# Altium PCB HANDS_FREE_ControlUnit_V2.PcbDoc (part 1 of 3)
Units mil, origin at the board's own origin, x right, y up, seen from the top; angles counter-clockwise.
Board outline 2130 x 3330 mil, 2 copper layers (Top Layer, Bottom Layer); 111 components, 108 nets, 500 pads, 191 vias.
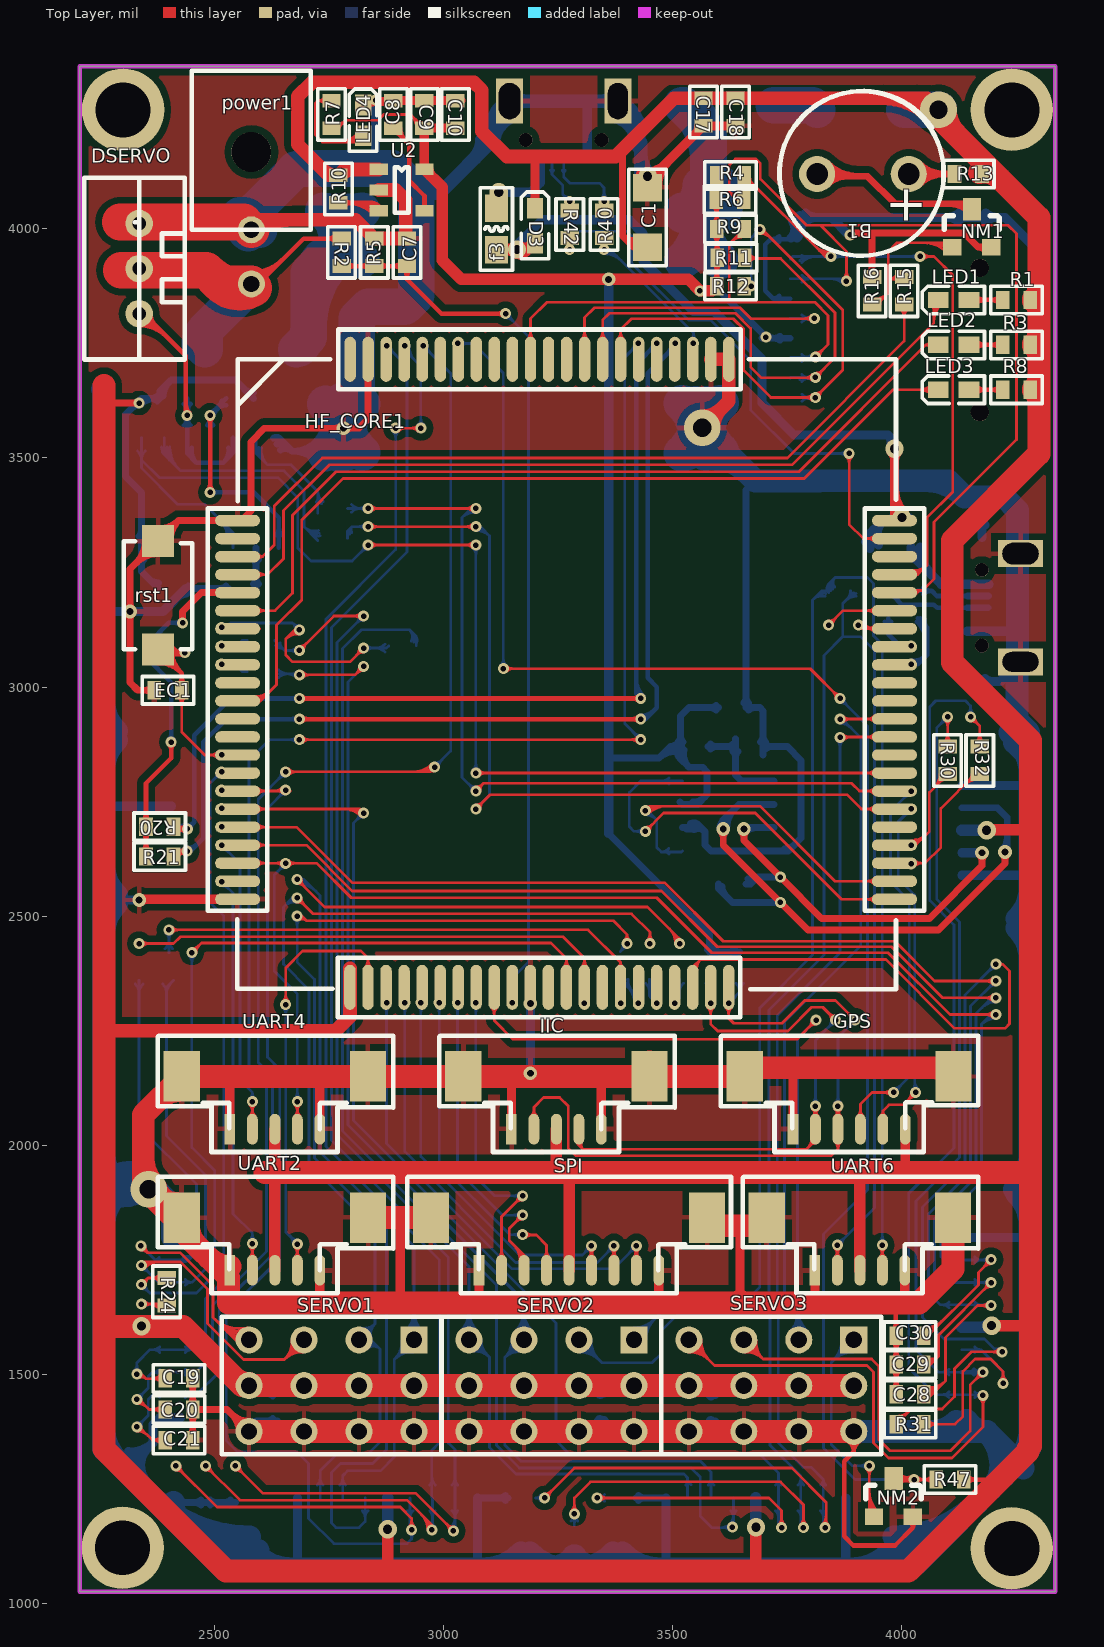
[diagram p0: Top Layer view]
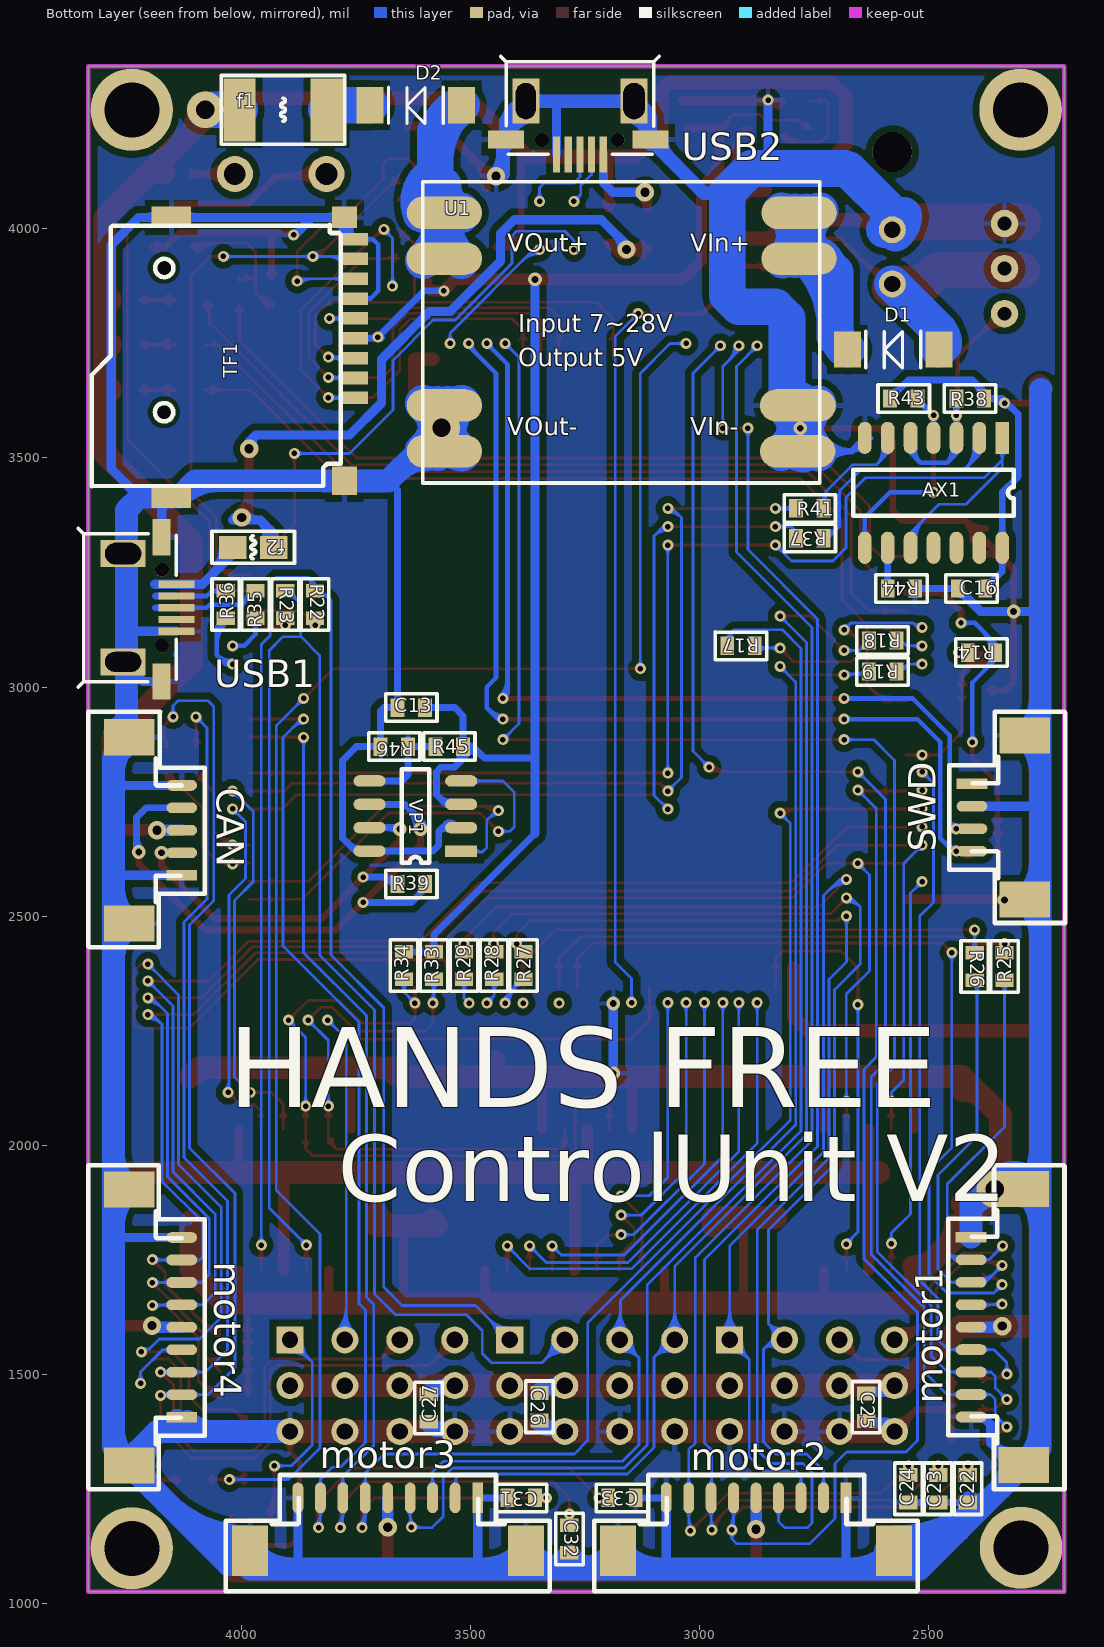
[diagram p1: Bottom Layer view, seen from below]

## Layer stack, top to bottom
Top Layer: signal copper 1.4
Dielectric: dielectric 12.6, FR-4, Dk 4.8
Bottom Layer: signal copper 1.4

## Board outline
2205,1025 4335,1025 4335,4355 2205,4355

## Design rules (kind name [scope] priority, off if disabled: settings)
Clearance [All] p1: gap=6
ComponentClearance [All] p1 off: gap=10 collisioncheckmode=3 verticalgap=10 showdistances=FALSE
Height [All] p1 off: minheight=0 maxheight=1000 prefheight=500
PolygonConnect [All] p1: connectstyle=Relief reliefconductorwidth=10 reliefentries=4 polygonreliefangle="90 Angle"
RoutingVias [All] p1: holewidth=15 width=30 viastyle="Through Hole" minholewidth=12 minwidth=24 maxholewidth=40 maxwidth=80
SilkscreenOverComponentPads [All] p1: minsilkscreentomaskgap=10
SolderMaskExpansion [All] p1: expansion=4
Width [All] p1: maxlimit=200 minlimit=6 preferedwidth=6
25 further rules are at their usual default settings.

## Components (designator, comment, footprint, x,y, rotation, side; value= is the part's Value field where it differs from the comment)
AX1 "CHP_74HC126D" CHP_SOP_14P 2340,3544 r270 bottom
B1 "ELE_蜂鸣器 9*5.5 mm 3V" ELE_蜂鸣器_D_9*5.5 3915,4120 r180 top
C1 "47uf" ELE_1206_P 3445,4090 r270 top
C7 "10uf" ELE_0603_P 2919.63,3949 r90 top
C8 "10nf" ELE_0603_P 2890.02,4250 r270 top
C9 "22uF" ELE_0603_P 2957.51,4250 r90 top
C10 "0.1uF" ELE_0603_P 3025,4250 r90 top
C13 "10uf" ELE_0603_P 3630,2955 r180 bottom
C16 "10uf" ELE_0603_P 2407,3215 r0 bottom
C17 "10uf" ELE_0603_P 3567,4255 r270 top
C18 "1uf" ELE_0603_P 3637,4255 r270 top
C19 "100pf" ELE_0603_P 2422,1491 r180 top
C20 "100pf" ELE_0603_P 2422,1423 r180 top
C21 "100pf" ELE_0603_P 2422,1356 r180 top
C22 "100pf" ELE_0603_P 2415,1250 r90 bottom
C23 "100pf" ELE_0603_P 2480,1250 r90 bottom
C24 "100pf" ELE_0603_P 2545,1250 r90 bottom
C25 "10uf" ELE_0603_P 2637,1428 r270 bottom
C26 "10uf" ELE_0603_P 3350,1429 r270 bottom
C27 "10uf" ELE_0603_P 3592,1426 r270 bottom
C28 "100pf" ELE_0603_P 4018,1456 r0 top
C29 "100pf" ELE_0603_P 4018,1521 r0 top
C30 "100pf" ELE_0603_P 4018,1584 r0 top
C31 "100pf" ELE_0603_P 3390,1230 r180 bottom
C32 "100pf" ELE_0603_P 3285,1140 r90 bottom
C33 "100pf" ELE_0603_P 3170,1230 r0 bottom
CAN "HANDS_FREE_IMU" HDR_Molex_PH_1.25_5P 4131,2589 r90 bottom
D1 "SS34" ELE_D1206 2478,3837 r0 bottom
D2 "SS34" ELE_D1206 3520,4370 r0 bottom
D3 "1N5819" ELE_SOD-323 3200,3970 r90 top
DSERVO "HDR_Header_1*3" HDR_数字舵机接口_D 2335,3815 r180 top
EC1 "10uf" ELE_0603_P 2398,2993 r180 top
f1 "1812/3A" ELE_FUZE_1812 3840,4255 r0 bottom
f2 "0805/500mA" ELE_FUZE_0805 4020,3305 r180 bottom
f3 "0805/500mA" ELE_FUZE_0805 3115,4045 r270 top
GPS "HANDS_FREE_GPS" HDR_Molex_PH_1.25_6P 3762,2035 r0 top
HF_CORE1 "MDE_HF_CORE1" MDE_HF_CORE1 3267,3030 r0 top
IIC "HANDS_FREE_IIC" HDR_Molex_PH_1.25_5P 3147.5,2035 r0 top
LED1 "ELE_LED" ELE_0603极性_P 4135,3841 r180 top
LED2 "ELE_LED" ELE_0603极性_P 4135,3743 r180 top
LED3 "ELE_LED" ELE_0603极性_P 4135,3645 r180 top
LED4 "Led_sp" ELE_0603极性_P 2820,4215 r90 top
motor1 "Motor Io header" HDR_Molex_PH_1.25_9P 2408,1799 r270 bottom
motor2 "Motor Io header" HDR_Molex_PH_1.25_9P 2681,1230 r0 bottom
motor3 "Motor Io header" HDR_Molex_PH_1.25_9P 3485,1230 r0 bottom
motor4 "Motor Io header" HDR_Molex_PH_1.25_9P 4131,1406 r90 bottom
NM1 "AO3400" CHP_SOT23_P_3P 4110,3960 r0 top
NM2 "AO3400" CHP_SOT23_P_3P 3939,1189 r0 top
power1 "HDR_Header_Power_2P" HDR_MOLEX_CANMX3.0_DH_2P 2580,3880 r90 top
R1 "10K" ELE_0603_P 4250,3845 r180 top
R2 "10K" ELE_0603_P 2777,3949 r270 top
R3 "10K" ELE_0603_P 4250,3747 r180 top
R4 "10K" ELE_0603_P 3626,4117 r180 top
R5 "1K" ELE_0603_P 2848.29,3949 r90 top
R6 "10K" ELE_0603_P 3625,4064 r180 top
R7 "1k" ELE_0603_P 2755,4250 r90 top
R8 "10K" ELE_0603_P 4250,3649 r180 top
R9 "10K" ELE_0603_P 3626,4000 r180 top
R10 "1k" ELE_0603_P 2770,4087 r270 top
R11 "10K" ELE_0603_P 3627,3937 r180 top
R12 "10K" ELE_0603_P 3626,3875 r180 top
R13 "120R" ELE_0603_P 4145,4120 r180 top
R14 "10k" ELE_0603_P 2385,3075 r0 bottom
R15 "50R" ELE_0603_P 4005,3865 r270 top
R16 "10K" ELE_0603_P 3935,3865 r270 top
R17 "50R" ELE_0603_P 2910,3090 r0 bottom
R18 "50R" ELE_0603_P 2601,3101.5 r0 bottom
R19 "50R" ELE_0603_P 2601,3034 r0 bottom
R20 "10K" ELE_0603_P 2380,2695 r0 top
R21 "10K" ELE_0603_P 2380,2630 r0 top
R22 "50R" ELE_0603_P 3840,3180 r270 bottom
R23 "50R" ELE_0603_P 3904.99,3180 r270 bottom
R24 "50R" ELE_0603_P 2395,1680 r270 top
R25 "50R" ELE_0603_P 2335,2390 r270 bottom
R26 "50R" ELE_0603_P 2400,2390 r270 bottom
R27 "50R" ELE_0603_P 3385,2392 r90 bottom
R28 "50R" ELE_0603_P 3449.12,2392 r90 bottom
R29 "50R" ELE_0603_P 3514.75,2392 r90 bottom
R30 "50R" ELE_0603_P 4100,2840 r270 top
R31 "50R" ELE_0603_P 4018,1391 r0 top
R32 "50R" ELE_0603_P 4170,2840 r270 top
R33 "10K" ELE_0603_P 3580.37,2392 r90 bottom
R34 "10K" ELE_0603_P 3646,2392 r90 bottom
R35 "50R" ELE_0603_P 3969.97,3180 r90 bottom
R36 "50R" ELE_0603_P 4035,3180 r90 bottom
R37 "50R" ELE_0603_P 2760,3325 r0 bottom
R38 "10K" ELE_0603_P 2410,3630 r0 bottom
R39 "120R" ELE_0603_P 3630,2570 r180 bottom
R40 "50R" ELE_0603_P 3350,4010 r90 top
R41 "50R" ELE_0603_P 2760,3390 r180 bottom
R42 "50R" ELE_0603_P 3275,4010 r90 top
R43 "10K" ELE_0603_P 2555,3630 r0 bottom
R44 "10k" ELE_0603_P 2560,3215 r180 bottom
R45 "1K" ELE_0603_P 3547,2870 r180 bottom
R46 "1K" ELE_0603_P 3667,2870 r0 bottom
R47 "10K" ELE_0603_P 4105,1270 r180 top
rst1 "ELE_KEY_1" ELE_KEY_P 2376,3161 r90 top
SERVO1 "HDR_Header_4*3" HDR_Header_2.54/3.0_DV_3*4 2935,1575 r180 top
SERVO2 "HDR_Header_4*3" HDR_Header_2.54/3.0_DV_3*4 3415,1575 r180 top
SERVO3 "HDR_Header_4*3" HDR_Header_2.54/3.0_DV_3*4 3895,1575 r180 top
SPI "HANDS_FREE_SPI" HDR_Molex_PH_1.25_9P 3077,1727 r0 top
SWD "HANDS_FREE_SWD" HDR_Molex_PH_1.25_4P 2406,2789 r270 bottom
TF1 "HDR_MicroTFCARD" HDR_TFCARD_P 3955,3720 r0 bottom
U1 "MDE_DM02-5.0" MDE_DM02-5.0 3171,3775 r180 bottom
U2 "" CHP_SOT23_P_5P 2863,4125 r0 top
UART2 "HANDS_FREE_USART" HDR_Molex_PH_1.25_5P 2533,1727 r0 top
UART4 "HANDS_FREE_USART" HDR_Molex_PH_1.25_5P 2533,2035 r0 top
UART6 "HANDS_FREE_USART" HDR_Molex_PH_1.25_5P 3810,1727 r0 top
USB1 "USBMICRO" HDR_USB_Micro2 4144,3175 r270 bottom
USB2 "USBMICRO" HDR_USB_Micro2 3260,4164 r0 bottom
VP1 "CHP_VP230_P" CHP_VP230_P 3521,2642 r0 bottom

## Footprints (in the part's own frame and the unit in brackets; to place one, negate y for a bottom-side part, rotate by r counter-clockwise, add the part's x,y. Pads: shape width x height; smd on the part's side, far side on the other; paste and mask are expansions set on the pad)
CHP_SOP_14P [mil]
  rect 70x30 smd: 1(0,0)
  oval 70x30 smd: 2(0,-50) 3(0,-100) 4(0,-150) 5(0,-200) 6(0,-250) 7(0,-300) 8(240,-300) 9(240,-250) 10(240,-200) 11(240,-150) 12(240,-100) 13(240,-50) 14(240,0)
  silkscreen extent 70,-325 170,25
CHP_SOT23_P_3P [mil]
  rect 40x36 smd: 1(0,0) 2(85,0)
  rect 40x50 smd: 3(43,83)
  silkscreen extent -18,39 103,69
CHP_SOT23_P_5P [mil]
  rect 40x25 smd: 1(-5,5) 2(-5,-40) 3(-5,-85) 4(95,-85) 5(95,5)
  silkscreen extent 30,-90 60,10
CHP_VP230_P [mil]
  rect 70x25 smd: 1(0,0)
  oval 70x25 smd: 2(0,-51) 3(0,-102) 4(0,-153) 5(200,-153) 6(200,-102) 7(200,-51) 8(200,0)
  silkscreen extent 70,-178 130,26
ELE_0603_P [mil]
  rect 30x40 smd: 1(-30,0) 2(30,0)
  silkscreen extent -56,-30 56,30
ELE_0603极性_P [mil]
  rect 45x35.43 smd: 1(-11.46,-4) 2(55.46,-4)
  silkscreen extent -45,-34 91,26
ELE_1206_P [mil]
  rect 60x62.99 smd: 1(0,0) 2(130,0)
  silkscreen extent -40,-41 170,41
ELE_D1206 [mm]
  rect 1.5x2 smd: 1(0,2.54) 2(5.08,2.54)
  silkscreen extent 1.02,1.52 4.06,3.56
ELE_FUZE_0805 [mil]
  rect 60x50 smd: 1(0,0) 2(90,0)
  silkscreen extent -45,-35 135,35
ELE_FUZE_1812 [mm]
  rect 1.8x3.5 smd: 1(-0.635,-0.127) 2(4.191,-0.127)
  silkscreen extent -1.65,-2.03 5.21,1.78
ELE_KEY_P [mil]
  rect 70x70 smd: 1(157.48,0) 2(-78.74,0)
  silkscreen extent -79,-75 157,75
ELE_SOD-323 [mil]
  rect 45x35.43 smd: 1(-1.46,1) 2(75.46,1)
  silkscreen extent -35,-29 111,31
ELE_蜂鸣器_D_9*5.5 [mm]
  round 2 hole 1.2: 1(-2.54,0) 2(2.54,0)
  silkscreen extent -4.49,-4.6 4.63,4.53
HDR_Header_2.54/3.0_DV_3*4 [mm]
  rect 1.5x1.5 hole 0.9: 1(0,0)
  round 1.5 hole 0.9: 2(0,2.54) 3(0,5.08) 4(3.048,0) 5(3.048,2.54) 6(3.048,5.08) 7(6.096,0) 8(6.096,2.54) 9(6.096,5.08) 10(9.144,0) 11(9.144,2.54) 12(9.144,5.08)
  silkscreen extent -1.52,-1.27 10.67,6.35
HDR_MOLEX_CANMX3.0_DH_2P [mm]
  round 1.5 hole 0.9: 1(0,0) 2(3,0)
  round 2.2 hole 2.2: 3(7.315,0)
  silkscreen extent 3,-3.3 11.81,3.3
HDR_Molex_PH_1.25_4P [mm]
  rect 0.6x1.7 smd: 1(0,0)
  oval 0.6x1.7 smd: 2(1.25,0) 3(2.5,0) 4(3.745,0)
  rect 2x2.8 smd: 5(-2.667,2.921) 6(6.417,2.921)
  silkscreen extent -3.99,-1.27 7.72,5.18
HDR_Molex_PH_1.25_5P [mm]
  rect 0.6x1.7 smd: 1(0,0)
  oval 0.6x1.7 smd: 2(1.25,0) 3(2.5,0) 4(3.745,0) 5(4.989,0)
  rect 2x2.8 smd: 6(-2.667,2.921) 7(7.656,2.921)
  silkscreen extent -3.99,-1.27 9.07,5.18
HDR_Molex_PH_1.25_6P [mm]
  rect 0.6x1.7 smd: 1(0,0)
  oval 0.6x1.7 smd: 2(1.25,0) 3(2.5,0) 4(3.745,0) 5(4.989,0) 6(6.234,0)
  rect 2x2.8 smd: 7(-2.667,2.921) 8(8.901,2.921)
  silkscreen extent -3.99,-1.27 10.29,5.18
HDR_Molex_PH_1.25_9P [mm]
  rect 0.6x1.7 smd: 1(0,0)
  oval 0.6x1.7 smd: 2(1.25,0) 3(2.5,0) 4(3.745,0) 5(4.989,0) 6(6.234,0) 7(7.478,0) 8(8.723,0) 9(9.968,0)
  rect 2x2.8 smd: 10(-2.667,2.921) 11(12.635,2.921)
  silkscreen extent -3.99,-1.27 13.97,5.18
HDR_TFCARD_P [mm]
  round 1 hole 1: 0(5.461,-4.953) 0(5.461,3.048)
  rect 1.6x0.7 smd: 1(-5.05,2.25) 2(-5.05,1.15) 3(-5.05,0.05) 4(-5.05,-1.05) 5(-5.05,-2.15) 6(-5.05,-3.25) 7(-5.05,-4.35) 8(-5.05,-5.45) 9(-5.05,-6.55)
  rect 1.4x1.2 smd: 10(-4.55,-7.75)
  rect 2.2x1.2 smd: 11(5.05,-7.75) 12(5.05,7.75)
  rect 1.4x1.6 smd: 13(-4.55,6.85)
  silkscreen extent -4.35,-7.34 9.47,7.15
HDR_USB_Micro2 [mm]
  rect 0.4x2 smd: 1(-1.252,0.029) 2(-0.602,0.029) 3(0.048,0.029) 4(0.698,0.029) 5(1.348,0.029)
  rect 2x1 smd: 5(-3.859,-0.784) 5(4.142,-0.784)
  rect 1.5x2.5 hole 1.2 slot 2 at 90 deg: 5(-2.952,-2.921)
  rect 1.5x2.5 hole 1.1 slot 2 at 90 deg: 5(3.048,-2.921)
  round 0.762 hole 0.762: 6(-2.052,-0.771) 6(2.148,-0.771)
  silkscreen extent -4.35,-5.41 4.44,0.03
HDR_数字舵机接口_D [mil]
  round 60 hole 30: 1(0,0) 2(0,-98.43) 3(0,-196.85)
  silkscreen extent -100,-297 120,100
MDE_DM02-5.0 [mm]
  round 1.8 smd: 1(-11.014,6.613) 2(-11.033,4.073) 3(-11.014,-4.073) 4(-11.013,-6.613) 5(10.959,-6.613) 6(10.982,-4.073) 7(11.033,4.073) 8(11.033,6.613)
  rect 2.2x1.8 smd: 1(-9.923,6.613) 2(-9.923,4.073) 3(-9.922,-4.073) 4(-9.897,-6.613) 5(9.867,-6.613) 6(9.867,-4.073) 7(9.937,4.073) 8(9.937,6.613)
  oval 2x1.8 smd: 1(-8.732,6.613) 2(-8.732,4.073) 3(-8.731,-4.073) 4(-8.731,-6.613) 5(8.678,-6.613) 6(8.678,-4.073) 7(8.748,4.073) 8(8.748,6.613)
  Top Layer lines w0.4: 8.748,4.073 9.389,3.471 9.362,3.498 8.768,4.093 8.748,4.113
  silkscreen extent -11.01,-8.37 10.99,8.33
MDE_HF_CORE1 [mil]
  oval 98.43x25 smd: 1(-717,333.49) 2(-717,294.12) 3(-717,254.75) 4(-717,215.38) 5(-717,176.01) 6(-717,136.64) 7(-717,97.27) 8(-717,57.9) 9(-717,18.53) 10(-717,-20.84) 11(-717,-60.21) 12(-717,-99.58) 13(-717,-138.95) 14(-717,-178.32) 15(-717,-217.69) 16(-717,-257.06) 17(-717,-296.43) 18(-717,-335.8) 19(-717,-375.17) 20(-717,-414.54) 21(-717,-453.91) 22(-717,-493.28) 45(717,-493.28) 46(717,-453.91) 47(717,-414.54) 48(717,-375.17) 49(717,-335.8) 50(717,-296.43) 51(717,-257.06) 52(717,-217.69) 53(717,-178.32) 54(717,-138.95) 55(717,-99.58) 56(717,-60.21) 57(717,-20.84) 58(717,18.53) 59(717,57.9) 60(717,97.27) 61(717,136.64) 62(717,176.01) 63(717,215.38) 64(717,254.75) 65(717,294.12) 66(717,333.49)
  oval 25x98.43 smd: 23(-471.77,-685.5) 24(-432.4,-685.5) 25(-393.03,-685.5) 26(-353.66,-685.5) 27(-314.29,-685.5) 28(-274.92,-685.5) 29(-235.55,-685.5) 30(-196.18,-685.5) 31(-156.81,-685.5) 32(-117.44,-685.5) 33(-78.07,-685.5) 34(-38.7,-685.5) 35(0.67,-685.5) 36(40.04,-685.5) 37(79.41,-685.5) 38(118.78,-685.5) 39(158.15,-685.5) 40(197.52,-685.5) 41(236.89,-685.5) 42(276.26,-685.5) 43(315.63,-685.5) 44(355,-685.5) 67(355.36,685.5) 68(315.99,685.5) 69(276.62,685.5) 70(237.25,685.5) 71(197.88,685.5) 72(158.51,685.5) 73(119.14,685.5) 74(79.77,685.5) 75(40.4,685.5) 76(1.03,685.5) 77(-38.34,685.5) 78(-77.71,685.5) 79(-117.08,685.5) 80(-156.45,685.5) 81(-195.82,685.5) 82(-235.19,685.5) 83(-274.56,685.5) 84(-313.93,685.5) 85(-353.3,685.5) 86(-392.67,685.5) 87(-432.04,685.5) 88(-471.41,685.5)
  silkscreen extent -782,-750 782,751

## Part data
AX1: library part CHP_74HC1
B1: library part "ELE_蜂鸣器 9*"
C7 C19 C20 C21 C22 C23 C24 C28 C29 C30 C31 C32 C33 EC1: library part ELE_Standard_Cap100pf
C13 C16 C17 C25 C26 C27: library part ELE_Standard_Cap10uf
C18: library part ELE_Standard_Cap1uf
CAN GPS IIC SPI SWD: library part HANDS
D1 D2: library part ELE_Standard_Diode_1206
D3: library part ELE_Standard_Diode_SOD323
f1: library part ELE_Standard_Fuze_1812/3A
f2 f3: library part ELE_Standard_Fuze_0805/500mA
HF_CORE1: "HANDS"
LED1 LED2 LED3: library part EL
motor1 motor2 motor3 motor4: library part HANDS_FREE_MOTOR, "卧贴"
NM1 NM2: library part ELE_NMOS_1
power1: library part HDR_Header
R1 R2 R3 R8: library part ELE_Standard_R1K
R4 R5 R6 R9 R11 R12 R13 R16 R20 R21 R33 R34 R38 R45 R46 R47: library part ELE_Standard_R10K
R7 R10 R14 R15 R17 R18 R19 R22 R23 R24 R25 R26 R27 R28 R29 R30 R31 R32 R35 R36 R37 R40 R41 R42 R43 R44: library part ELE_Standard_R50R
R39: library part ELE_Standard_R120R
SERVO1 SERVO2 SERVO3: library part HDR_Header_
TF1: library part HDR_Mi
U1: library part MDE
U2: library part CHP_RT9193, "贴片 RT9"
UART2 UART4 UART6: library part HANDS_F
USB1 USB2: library part HD
VP1: library part CH

## Free pads (board coordinates)
  round 180 hole 120: 0(2299,1121.14) 0(2300,4260) 0(4240,1120) 0(4240,4260)

## Via types
v1: diameter 24, hole 12, Top Layer to Bottom Layer, 168 vias
v2: diameter 40, hole 20, Top Layer to Bottom Layer, 10 vias
v3: diameter 30, hole 15, Top Layer to Bottom Layer, 10 vias
v4: diameter 80, hole 40, Top Layer to Bottom Layer, 3 vias

## Nets (pads, with @x,y where several pads share a name; then routed paths per layer and width w, separated by ;. In a path a pad name is that pad's centre, name@x,y a point inside that pad or via, vN(x,y) a via of type N, cw(c..) or ccw(c..) an arc to the next point about the centre after c; other vN are vias at no path point)
ADC_IN_POWER: C7.1 HF_CORE1.32 R2.2 R5.1 | length 2241.9
  Top Layer w10: R2.2@2777,3919 R5.1@2848.29,3919 C7.1@2919.63,3919 2919.63,3890.37 2995,3815 v1(3135,3815) ; R2.2@2789.07,3911.93 cw(c2806.14,3894.86) 2806.14,3919 cw(c2806.14,3943.14) R2.2@2789.07,3926.07 ; R5.1@2836.22,3911.93 ccw(c2819.15,3894.86) 2819.15,3919 ccw(c2819.15,3943.14) R5.1@2836.22,3926.07 ; R5.1@2860.36,3911.93 cw(c2877.44,3894.86) 2877.44,3919 cw(c2877.44,3943.14) R5.1@2860.36,3926.07 ; C7.1@2907.56,3911.93 ccw(c2890.48,3894.86) 2890.48,3919 ccw(c2890.48,3943.14) C7.1@2907.56,3926.07 ; C7.1@2912.56,3911.93 cw(c2895.48,3894.86) 2919.63,3894.86 cw(c2943.77,3894.86) C7.1@2926.7,3911.93 ; v1@3130.05,3810.05 ccw(c3118.1,3798.1) 3118.1,3815 ccw(c3118.1,3831.9) v1@3130.05,3819.95
  Bottom Layer w6: v1@3135,3806 cw(c3135,3784.27) 3150.36,3799.64 cw(c3165.73,3815) v1@3144,3815 ; v1(3135,3815) 3185,3765 3185,2400 3149,2364 v1(3149,2311) ; v1@3142.64,2317.36 ccw(c3127.27,2332.73) 3149,2332.73 ccw(c3170.73,2332.73) v1@3155.36,2317.36
AX_DATA: AX1.3 AX1.5 DSERVO.1 R38.2 | length 1027.4
  Top Layer w10: DSERVO.1@2335,3790 cw(c2335,3705.5) 2394.75,3765.25 ; DSERVO.1@2335,3800 cw(c2335,3739.64) 2377.68,3782.32 ; DSERVO.1@2335,3805 2355,3805 2437,3723 2437,3595 2439,3593 v1(2440,3593) ; DSERVO.1@2360,3815 ccw(c2396.21,3815) 2370.61,3789.39 ; 2437,3617.14 ccw(c2464.14,3617.14) v1@2444.95,3597.95
  Bottom Layer w10: AX1.3@2432.93,3571.07 ccw(c2415.86,3588.14) 2440,3588.14 ccw(c2464.14,3588.14) AX1.3@2447.07,3571.07 ; R38.2@2432.93,3617.93 cw(c2415.86,3600.86) 2440,3600.86 cw(c2464.14,3600.86) R38.2@2447.07,3617.93 ; v1@2434.82,3597.7 ccw(c2425.41,3606.24) 2437.68,3609.53 ; v1@2434.85,3588.26 cw(c2426.92,3580.96) AX1.3@2437.33,3578.18 ; v1@2435.05,3588.05 cw(c2423.1,3576.1) 2440,3576.1 cw(c2456.9,3576.1) v1@2444.95,3588.05 ; v1@2435.05,3597.95 ccw(c2423.1,3609.9) 2440,3609.9 ccw(c2456.9,3609.9) v1@2444.95,3597.95 ; v1@2436.5,3586.94 cw(c2430.2,3576.02) 2442.37,3579.28 ; v1@2436.5,3599.06 ccw(c2431.52,3607.69) 2441.14,3605.11 ; 2437.63,3579.28 cw(c2449.8,3576.02) v1@2443.5,3586.94 ; 2438.86,3605.11 ccw(c2448.48,3607.68) v1@2443.5,3599.06 ; AX1.3@2440,3524 ccw(c2462.82,3519.95) 2446.43,3503.57 ; R38.2@2440,3630 v1(2440,3593) AX1.3@2440,3544 2440,3510 2460,3490 ; 2442.32,3609.53 ccw(c2454.59,3606.24) v1@2445.18,3597.7 ; AX1.3@2442.67,3578.18 cw(c2453.08,3580.96) v1@2445.15,3588.26 ; AX1.3@2449.85,3522.25 ccw(c2485.86,3515.87) 2460,3490 ; AX1.5@2530.09,3522.69 cw(c2491.43,3517.58) 2519,3490 ; 2533.33,3504.33 ccw(c2516.74,3520.92) AX1.5@2540,3524 ; AX1.5@2540,3544 2540,3511 2519,3490 ; 2460,3490 2519,3490
AX_IO: AX1.1 AX1.10 HF_CORE1.52 | length 3059.9
  Top Layer w6: v1(2835,3310) v1(3070,3310) ; v1@2841.36,3303.64 cw(c2856.73,3288.27) 2856.73,3310 cw(c2856.73,3331.73) v1@2841.36,3316.36 ; v1@3063.64,3303.64 ccw(c3048.27,3288.27) 3048.27,3310 ccw(c3048.27,3331.73) v1@3063.64,3316.36 ; v1(3070,2812.31) HF_CORE1.52@3984,2812.31 ; v1@3076.36,2805.95 cw(c3091.73,2790.58) 3091.73,2812.31 cw(c3091.73,2834.04) v1@3076.36,2818.67 ; HF_CORE1.52@3940.57,2805.59 ccw(c3924.35,2789.38) 3924.35,2812.31 ccw(c3924.35,2835.25) HF_CORE1.52@3940.57,2819.03
  Bottom Layer w6: AX1.1@2331.72,3515.31 cw(c2313.34,3496) 2340,3496 ; AX1.1@2340,3544 2340,3496 ; AX1.1@2348.28,3515.31 ccw(c2366.66,3496) 2340,3496 ; 2510.32,3366.68 cw(c2467.64,3324) AX1.10@2528,3324 ; 2520.56,3356.44 cw(c2488.13,3324) AX1.10@2534,3324 ; 2530.81,3346.19 cw(c2508.62,3324) AX1.10@2540,3324 ; AX1.10@2540,3304 2540,3337 2478,3399 2419,3399 2340,3478 2340,3496 ; v1@2826,3310 cw(c2804.27,3310) 2819.64,3294.64 cw(c2835,3279.27) v1@2835,3301 ; v1(2835,3310) 2800,3275 2710,3275 2681,3304 2681,3414 2638,3457 2379,3457 2340,3496 ; v1@3063.64,2818.67 ccw(c3048.27,2834.04) 3070,2834.04 ccw(c3091.73,2834.04) v1@3076.36,2818.67 ; v1@3063.64,3303.64 cw(c3048.27,3288.27) 3070,3288.27 cw(c3091.73,3288.27) v1@3076.36,3303.64 ; v1@3067.02,2820.8 ccw(c3065.55,2825) 3070,2825 ; v1(3070,3310) 3070,2825 ; v1@3072.98,2820.8 cw(c3074.45,2825) 3070,2825
AX_IO1: AX1.4 AX1.8 R43.1 | length 818.7
  Top Layer w10: v1@2485.05,3429.95 ccw(c2473.1,3441.9) 2490,3441.9 ccw(c2506.9,3441.9) v1@2494.95,3429.95 ; v1@2485.05,3588.05 cw(c2473.1,3576.1) 2490,3576.1 cw(c2506.9,3576.1) v1@2494.95,3588.05 ; v1(2490,3425) v1@2490,3589 ; v1@2490,3589 v1(2490,3593) 2490,3595 v1@2490,3589
  Bottom Layer w10: AX1.4@2483.42,3571.53 ccw(c2470.8,3586) v1@2490,3586 ; v1@2485.05,3588.05 cw(c2473.1,3576.1) 2490,3576.1 cw(c2506.9,3576.1) v1@2494.95,3588.05 ; v1@2485.6,3587.56 cw(c2480.67,3581.46) 2488.24,3579.43 ; v1@2486.5,3586.94 cw(c2481.14,3577.66) 2491.49,3580.43 ; 2488.51,3580.43 cw(c2498.86,3577.66) v1@2493.5,3586.94 ; v1(2490,3425) 2585,3425 2640,3370 AX1.8@2640,3304 ; AX1.4@2490,3544 v1@2490,3586 ; v1@2490,3600 ccw(c2490,3612.07) 2498.54,3603.54 ; 2491.76,3579.43 cw(c2499.33,3581.46) v1@2494.4,3587.56 ; v1@2494.95,3420.05 cw(c2506.9,3408.1) 2506.9,3425 cw(c2506.9,3441.9) v1@2494.95,3429.95 ; AX1.4@2496.58,3571.53 cw(c2509.2,3586) v1@2490,3586 ; v1@2496.76,3591.19 cw(c2530.13,3582.25) R43.1@2512.86,3612.17 ; v1@2497,3593 cw(c2518.72,3593) 2503.36,3608.36 ; 2499.39,3604.39 cw(c2525,3578.79) R43.1@2525,3615 ; R43.1@2511.47,3616.46 ccw(c2502.93,3625) R43.1@2515,3625 ; R43.1@2525,3630 2490,3595 v1(2490,3593) v1@2490,3586 ; AX1.8@2632.93,3331.07 ccw(c2615.86,3348.14) 2640,3348.14 ccw(c2664.14,3348.14) AX1.8@2647.07,3331.07
BEEP: HF_CORE1.3 R15.2 | length 1849.1
  Top Layer w6: HF_CORE1.3@2550,3284.75 2604.75,3284.75 ; HF_CORE1.3@2594.55,3279.38 cw(c2604.75,3272.38) 2604.75,3284.75 ; HF_CORE1.3@2594.55,3290.13 ccw(c2604.75,3297.13) 2604.75,3284.75 ; R15.2@3996.52,3826.51 cw(c3976.03,3806.03) 4005,3806.03 cw(c4033.97,3806.03) R15.2@4013.49,3826.51 ; R15.2@4005,3835 4005,3755 3750,3500 2735,3500 2630,3395 2630,3310 2604.75,3284.75
CAN_N: CAN.2 R39.1 VP1.7 | length 976.2
  Top Layer w15: v3@3649.7,2684.7 cw(c3636.89,2671.89) 3655,2671.89 cw(c3673.11,2671.89) v3@3660.3,2684.7 ; v3@3655,2680 3655,2665 v1(3735,2585) 3825,2495 4060,2495 4175,2610 v3(4175,2638.21) ; v3@4169.7,2632.91 cw(c4156.89,2620.11) 4175,2620.11 cw(c4193.11,2620.11) v3@4180.3,2632.91
  Bottom Layer w15: v3(3655,2690) 3658,2693 VP1.7@3721,2693 ; R39.1@3660,2570 3670,2570 3685,2585 ; v3@3660.3,2684.7 cw(c3680.35,2664.65) 3680.35,2693 ; R39.1@3663.45,2581.66 ccw(c3671.94,2598.06) 3685,2585 ; v1(3735,2585) 3685,2585
  Bottom Layer w20: CAN.2@4131,2638.21 v3(4175,2638.21)
CAN_P: CAN.4 R39.2 VP1.6 | length 1511.6
  Top Layer w15: v3@3604.7,2684.7 cw(c3591.89,2671.89) 3610,2671.89 cw(c3628.11,2671.89) v3@3615.3,2684.7 ; v3(3610,2690) 3610,2655 v1(3735,2530) 3795,2470 4080,2470 4225,2615 v3(4225,2640) ; v3@4219.7,2634.7 cw(c4206.89,2621.89) 4225,2621.89 cw(c4243.11,2621.89) v3@4230.3,2634.7
  Bottom Layer w15: R39.2@3600,2570 3600,2560 3630,2530 v1(3735,2530) ; v3@3602.5,2690 cw(c3632.68,2690) 3611.34,2711.34 ; v3@3604.7,2695.3 ccw(c3591.89,2708.11) 3610,2708.11 ccw(c3628.11,2708.11) v3@3615.3,2695.3 ; R39.2@3607.5,2565 ccw(c3637.68,2565) 3616.34,2543.66 ; v3(3610,2690) 3610,2710 3644,2744 VP1.6@3721,2744 ; v3@3617.5,2690 cw(c3683.89,2690) 3636.95,2736.95 ; CAN.4@4131,2736.43 4208.57,2736.43 4230,2715 4230,2645 v3(4225,2640) ; v3@4219.7,2645.3 ccw(c4194.82,2670.18) 4230,2670.18
CANU_N: HF_CORE1.46 VP1.1 | length 999.2
  Top Layer w6: v1@3437.88,2732.12 cw(c3456.9,2713.1) 3456.9,2740 ; v1(3440,2730) 3450,2740 ; v1@3442.12,2727.88 cw(c3471.38,2698.62) 3471.38,2740 ; v1@3443.07,2738.46 ccw(c3445.33,2744.67) 3450,2740 ; v1@3446.36,2723.64 cw(c3485.87,2684.13) 3485.87,2740 ; v1@3448.46,2733.07 cw(c3454.67,2735.33) 3450,2740 ; HF_CORE1.46@3940.57,2569.37 ccw(c3924.35,2553.16) 3924.35,2576.09 ccw(c3924.35,2599.03) HF_CORE1.46@3940.57,2582.81 ; HF_CORE1.46@3984,2576.09 3853.91,2576.09 3690,2740 3450,2740
  Bottom Layer w6: v1@3440,2721 cw(c3440,2687.2) 3463.9,2711.1 ; v1@3440,2727 cw(c3440,2707.69) 3453.66,2721.34 ; v1(3440,2730) 3445,2730 3465,2710 3465,2650 3475,2640 ; v1@3449,2730 ccw(c3458.66,2730) 3451.83,2723.17 ; 3480.39,2640 cw(c3480.39,2623.89) VP1.1@3491.78,2635.28 ; VP1.1@3491,2647.83 cw(c3475,2660.26) 3475,2640 ; VP1.1@3521,2642 3519,2640 3475,2640
CANU_P: HF_CORE1.45 VP1.4 | length 1019.4
  Top Layer w6: v1(3440,2685) 3480,2725 3680,2725 3868.28,2536.72 HF_CORE1.45@3984,2536.72 ; v1@3440,2694 ccw(c3440,2715.73) 3455.36,2700.36 ccw(c3470.73,2685) v1@3449,2685 ; HF_CORE1.45@3940.57,2530 ccw(c3924.35,2513.79) 3924.35,2536.72 ccw(c3924.35,2559.66) HF_CORE1.45@3940.57,2543.44
  Bottom Layer w6: v1@3433.64,2678.64 ccw(c3418.27,2663.27) 3418.27,2685 ccw(c3418.27,2706.73) v1@3433.64,2691.36 ; v1(3440,2685) 3415,2685 3405,2695 3405,2770 3430,2795 VP1.4@3521,2795 ; VP1.4@3491.78,2788.28 ccw(c3475.57,2772.06) 3475.57,2795 ccw(c3475.57,2817.93) VP1.4@3491.78,2801.72
GND_CHIP: AX1.7 C1.1 C7.2 C8.1 C9.2 C10.2 C13.1 C16.2 C17.2 C18.2 C19.1 C20.1 C21.1 C22.1 C23.1 C24.1 C25.2 C26.2 C27.2 C28.1 C29.1 C30.1 C31.1 C32.1 C33.1 CAN.1 CAN.5 CAN.6 CAN.7 DSERVO.3 EC1.2 GPS.1 GPS.7 GPS.8 HF_CORE1.1 HF_CORE1.22 HF_CORE1.33 HF_CORE1.67 HF_CORE1.68 HF_CORE1.87 IIC.1 IIC.5 IIC.6 IIC.7 LED4.2 motor1.1 motor1.9 motor1.10 motor1.11 motor2.1 motor2.9 motor2.10 motor2.11 motor3.1 motor3.9 motor3.10 motor3.11 motor4.1 motor4.9 motor4.10 motor4.11 NM1.2 NM2.2 power1.2 R5.2 R16.1 R44.2 R46.2 rst1.1 SERVO1.3 SERVO1.6 SERVO1.9 SERVO1.12 SERVO2.3 SERVO2.6 SERVO2.9 SERVO2.12 SERVO3.3 SERVO3.6 SERVO3.9 SERVO3.12 SPI.1 SPI.9 SPI.10 SPI.11 SWD.2 SWD.5 SWD.6 TF1.6 TF1.9 TF1.10 TF1.11 TF1.12 TF1.13 U1.3 U1.4 U1.5 U1.6 U2.2 UART2.1 UART2.5 UART2.6 UART2.7 UART4.1 UART4.5 UART4.6 UART4.7 UART6.1 UART6.5 UART6.6 UART6.7 USB1.5 USB2.5 VP1.2 VP1.8 | length 37768.9
  Top Layer w10: EC1.2@2368,2993 EC1.2@2368,2996 ; power1.2@2580,3998.11 power1.2@2596.89,4015 ; SERVO3.3@3882.1,1354.14 cw(c3867.8,1331) 3895,1331 ; SERVO3.3@3895,1375 3895,1331 ; SERVO3.3@3907.9,1354.14 ccw(c3922.2,1331) 3895,1331 ; C28.1@3980.93,1468.07 ccw(c3966.27,1482.73) 3987,1482.73 ; C29.1@3980.93,1508.93 cw(c3966.27,1494.27) 3987,1494.27 ; C29.1@3980.93,1533.07 ccw(c3966.27,1547.73) 3987,1547.73 ; C30.1@3980.93,1571.93 cw(c3966.27,1557.27) 3987,1557.27 ; C30.1@3980.93,1596.07 ccw(c3966.27,1610.73) 3987,1610.73 ; C28.1@3987,1456 3987,1636 4006,1655 ; 3987,1487.56 ccw(c4014.56,1487.56) C28.1@3995.07,1468.07 ; 3987,1489.44 cw(c4014.56,1489.44) C29.1@3995.07,1508.93 ; 3987,1552.44 cw(c4014.56,1552.44) C30.1@3995.07,1571.93 ; 3987,1552.56 ccw(c4014.56,1552.56) C29.1@3995.07,1533.07 ; 3987,1615.56 ccw(c4014.56,1615.56) C30.1@3995.07,1596.07 ; NM2.2@4016.9,1178.11 cw(c4008.35,1165) 4024,1165 ; NM2.2@4024,1189 4024,1165 ; NM2.2@4031.1,1178.11 ccw(c4039.65,1165) 4024,1165 ; 3895,1331 3874,1310 3874,1146 3894,1126 3985,1126 4024,1165
  Top Layer w15: v3@2309.7,3159.7 cw(c2296.89,3146.89) 2315,3146.89 cw(c2333.11,3146.89) v3@2320.3,3159.7 ; v3@2309.7,3170.3 ccw(c2296.89,3183.11) 2315,3183.11 ccw(c2333.11,3183.11) v3@2320.3,3170.3 ; rst1.1@2348.5,3318.48 cw(c2282.11,3318.48) 2329.05,3271.53 cw(c2376,3224.59) rst1.1@2376,3290.98 ; EC1.2@2362.7,2987.7 ccw(c2349.89,2974.89) 2349.89,2993 ccw(c2349.89,3011.11) EC1.2@2362.7,2998.3 ; EC1.2@2368,2993 2332,2993 2315,3010 2315,3257.48 rst1.1@2376,3318.48 2421.01,3363.49 ; rst1.1@2376.83,3345.97 ccw(c2378.64,3405.86) 2421.01,3363.49 ; rst1.1@2403.49,3319.31 cw(c2463.38,3321.12) 2421.01,3363.49 ; C21.1@2446.7,1366.3 ccw(c2433.89,1379.11) 2452,1379.11 ccw(c2470.11,1379.11) C21.1@2457.3,1366.3 ; C20.1@2446.7,1412.7 cw(c2433.89,1399.89) 2452,1399.89 cw(c2470.11,1399.89) C20.1@2457.3,1412.7 ; C20.1@2446.7,1433.3 ccw(c2433.89,1446.11) 2452,1446.11 ccw(c2470.11,1446.11) C20.1@2457.3,1433.3 ; C19.1@2446.7,1480.7 cw(c2433.89,1467.89) 2452,1467.89 cw(c2470.11,1467.89) C19.1@2457.3,1480.7 ; C21.1@2452,1356 C20.1@2452,1423 ; C19.1@2452,1491 C20.1@2452,1423 ; C20.1@2457.3,1417.7 cw(c2470.11,1404.89) 2470.11,1423 cw(c2470.11,1441.11) C20.1@2457.3,1428.3 ; SERVO1.12@2552.97,1375 ccw(c2499.79,1375) 2537.4,1412.6 ccw(c2575,1450.21) SERVO1.12@2575,1397.03 ; SERVO1.12@2575,1375 2527,1423 C20.1@2452,1423 ; v3@2775.7,3559.7 ccw(c2762.89,3546.89) 2762.89,3565 ccw(c2762.89,3583.11) v3@2775.7,3570.3 ; v3@2786.3,3559.7 cw(c2799.11,3546.89) 2799.11,3565 cw(c2799.11,3583.11) v3@2786.3,3570.3 ; HF_CORE1.87@2834.96,3715.5 2834.96,3584.96 2815,3565 v3(2781,3565) 2609,3565 2579,3535 2579,3384 2558.49,3363.49 HF_CORE1.1@2550,3363.49 2421.01,3363.49 ; v1@3883,3983 v1(3887,3987) 3891.5,3991.5 3935,3991.5 ; v1@3890.18,3983.82 cw(c3908.73,3965.27) 3908.73,3991.5 ; R16.1@3929.7,3900.3 ccw(c3916.89,3913.11) 3935,3913.11 ccw(c3953.11,3913.11) R16.1@3940.3,3900.3 ; R16.1@3935,3895 3935,3991.5 ; NM1.2@4185.58,3952.58 ccw(c4167.65,3934.65) 4167.65,3960 ccw(c4167.65,3985.35) NM1.2@4185.58,3967.42 ; NM1.2@4195,3960 4167.09,3960 4135.59,3991.5 3935,3991.5
  Top Layer w20: v3(2335,2535) 2336.72,2536.72 HF_CORE1.22@2550,2536.72 ; v3@2338.54,2531.46 cw(c2351.22,2518.78) 2351.22,2536.72 ; 2532,2150 2533,2149 UART4.1@2533,2035 ; 2533,1658 UART2.1@2533,1727 ; 2725,2150 2729.43,2145.57 UART4.5@2729.43,2035 ; 2729.43,1668.57 UART2.5@2729.43,1727 ; LED4.2@2822.49,4278 2888.02,4278 C8.1@2890.02,4280 C9.2@2957.51,4280 C10.2@3025,4280 C10.2@3037.79,4280 ; LED4.2@2829.46,4269.79 cw(c2849.27,4249.97) v1@2849.27,4278 ; LED4.2@2838.93,4278 ccw(c2838.93,4293.07) v1@2849.59,4282.41 ; v1@2852.41,4282.41 ccw(c2863.07,4293.07) 2863.07,4278 ; 2868.12,4278 ccw(c2868.12,4296.9) C8.1@2881.48,4283.53 ; 2903,1655 2905,1657 2905,1842 ; 3077,1655 SPI.1@3077,1727 ; IIC.1@3147.5,2035 3147.5,2141.5 3156,2150 ; v3@3185,2150 v3@3188.93,2153.93 ; IIC.5@3343.93,2035 3343.93,2144.93 3349,2150 ; v2(3445,4115) 3435,4115 3430,4120 3462,4120 C17.2@3567,4225 C18.2@3637,4225 ; v2@3445,4125 ccw(c3445,4178.12) 3482.56,4140.56 ; C1.1@3466.5,4090 cw(c3549.77,4090) 3490.89,4148.89 ; 3469.43,1655.57 SPI.9@3469.43,1727 ; 3549.93,4207.93 ccw(c3532.86,4225) C17.2@3557,4225 ; 3647,1660 3647,1824 ; GPS.1@3762,2035 3762,2175 ; UART6.1@3810,1727 3810,1657 3812,1655 ; 4006,1655 4006.43,1655.43 UART6.5@4006.43,1727
  Top Layer w30: power1.2@2581.34,4012.58 ccw(c2583.7,4038.18) 2601.89,4020 ; power1.2@2590.27,3987.84 cw(c2667.92,3910.19) 2667.92,4020 ; power1.2@2594.47,3999.45 cw(c2620.07,4001.81) 2601.89,4020 ; power1.2@2596.89,4015 2601.89,4020 ; U2.2@2858,4085 2895,4085 2917,4063 2917,3981.63 C7.2@2919.63,3979 R5.2@2848.29,3979 2807.29,4020 2601.89,4020 ; v4(3564,3566) 3622.36,3624.36 HF_CORE1.67@3622.36,3715.5 HF_CORE1.68@3582.99,3715.5 ; v4@3564,3591 ccw(c3564,3651.36) 3606.68,3608.68 ccw(c3649.36,3566) v4@3589,3566
  Top Layer w50: 2344,1969.18 ccw(c2421.18,1969.18) v4@2366.61,1914.61 ; v4@2345.86,1906.14 ccw(c2428,1988.29) UART2.6@2428,1872.12 ; v4@2370.49,1907.88 ccw(c2416.07,1920.1) UART2.6@2392.48,1879.23 ; v4@2371,1904 ccw(c2426.53,1904) 2387.26,1864.74 ; 2376.59,2098.59 cw(c2428,2047.17) UART4.6@2428,2119.88 ; UART2.6@2442.37,1826.25 ccw(c2509.06,1826.25) 2461.9,1779.1 ; 2486.12,1754.88 ccw(c2533,1801.77) UART2.1@2533,1735.46 ; 2530,1655 2530,1711 2428,1813 2428,1824 2344,1908 2344,2066 UART4.6@2428,2150 2532,2150 2725,2150 UART4.7@2834.43,2150 IIC.6@3042.5,2150 3156,2150 3185,2150 3349,2150 IIC.7@3448.93,2150 ; 2533,1658 2533,1655 2903,1655 3077,1655 3652,1655 ; SERVO1.12@2575,1375 SERVO1.9@2695,1375 SERVO1.6@2815,1375 SERVO1.3@2935,1375 SERVO2.12@3055,1375 SERVO2.9@3175,1375 SERVO2.6@3295,1375 SERVO2.3@3415,1375 SERVO3.12@3535,1375 SERVO3.9@3655,1375 SERVO3.6@3775,1375 SERVO3.3@3895,1375 ; UART2.7@2834.43,1845.57 UART2.7@2834.43,1842 2905,1842 2970,1842 2972,1840 SPI.10@2972,1824 ; IIC.7@3448.93,2182.07 IIC.7@3448.93,2150 ; SPI.11@3574.43,1824 3647,1824 3705,1824 UART6.6@3705,1842 UART6.6@3705,1852 ; SPI.11@3584.59,1836.41 ccw(c3614.55,1866.38) 3614.55,1824 ; 3647,1660 3652,1655 ; GPS.7@3657,2171 GPS.7@3657,2169 ; GPS.7@3667.16,2155.59 cw(c3699.54,2123.2) 3699.54,2169 ; 4069.88,2169 cw(c4069.88,2123.2) GPS.8@4102.26,2155.59 ; UART6.7@4111.43,1833.57 4111.43,1729.43 4037,1655 4006,1655 3812,1655 3652,1655 ; GPS.8@4112.43,2150 4093.43,2169 GPS.7@3657,2169 ; IIC.7@3448.93,2150 GPS.7@3657,2150 GPS.7@3657,2169 ; 3664.87,1824 ccw(c3664.87,1866.38) UART6.6@3694.84,1836.41 ; 3664.87,1824 ccw(c3664.87,1866.38) UART6.6@3694.84,1836.41 ; 3664.87,1824 ccw(c3664.87,1866.38) UART6.6@3694.84,1836.41
  Top Layer w80: 2294,4015 2563.11,4015 power1.2@2580,3998.11
  Bottom Layer w10: TF1.6@3731.87,3842.15 ccw(c3719.05,3830.88) 3719.05,3847.95 ; TF1.6@3731.87,3853.75 cw(c3719.05,3865.03) 3719.05,3847.95 ; TF1.9@3732.26,3971.67 ccw(c3717.27,3956.68) 3717.27,3977.87 ccw(c3717.27,3999.07) TF1.9@3732.26,3984.08 ; TF1.6@3756.18,3847.95 3719.05,3847.95 ; TF1.9@3758.31,3980 TF1.9@3756.18,3977.87 3713.87,3977.87 3702,3966 3702,3865 3719.05,3847.95
  Bottom Layer w15: C22.1@2415,1220 C23.1@2480,1220 C24.1@2545,1220 ; C22.1@2425.3,1214.7 cw(c2438.11,1201.89) 2438.11,1220 cw(c2438.11,1238.11) C22.1@2425.3,1225.3 ; C16.2@2437,3215 R44.2@2530,3215 ; C16.2@2442.3,3209.7 cw(c2455.11,3196.89) 2455.11,3215 cw(c2455.11,3233.11) C16.2@2442.3,3220.3 ; C23.1@2469.7,1214.7 ccw(c2456.89,1201.89) 2456.89,1220 ccw(c2456.89,1238.11) C23.1@2469.7,1225.3 ; C23.1@2490.3,1214.7 cw(c2503.11,1201.89) 2503.11,1220 cw(c2503.11,1238.11) C23.1@2490.3,1225.3 ; R44.2@2524.7,3209.7 ccw(c2511.9,3196.9) 2511.9,3215 ccw(c2511.89,3233.11) R44.2@2524.7,3220.3 ; C24.1@2534.7,1214.7 ccw(c2521.89,1201.89) 2521.89,1220 ccw(c2521.89,1238.11) C24.1@2534.7,1225.3 ; SERVO1.12@2567.42,1377.47 cw(c2595.69,1368.27) 2595.69,1398 ; SERVO1.12@2575,1375 2598,1398 C25.2@2637,1398 ccw(c2637,1354.83) SERVO1.12@2595.95,1368.19 ; SERVO1.12@2581.68,1372.83 cw(c2616.34,1361.55) 2616.34,1398 ; 2613.25,1391.64 ccw(c2608.31,1410.08) C25.2@2625.32,1401.41 ; C25.2@2617.86,1392.87 cw(c2621.4,1379.65) C25.2@2628.25,1391.5 ; C25.2@2626.7,1392.7 ccw(c2613.89,1379.89) 2613.89,1398 ccw(c2613.89,1416.11) C25.2@2626.7,1403.3 ; AX1.7@2628.19,3543.15 cw(c2634.3,3533.25) AX1.7@2642.53,3541.47 ; AX1.7@2636.06,3530.38 cw(c2644.53,3516.65) 2655.94,3528.06 ; AX1.7@2640,3544 2669.35,3514.65 ; AX1.7@2643.94,3517.62 cw(c2654.77,3500.06) 2669.35,3514.65 ; U1.5@2719.81,3494.89 ccw(c2672.12,3447.21) 2672.12,3514.65 ccw(c2672.12,3582.08) U1.5@2719.81,3534.4 ; U1.5@2739.56,3514.65 2669.35,3514.65 ; U1.5@2754.91,3494.89 ccw(c2707.22,3447.21) 2707.22,3514.65 ccw(c2707.22,3582.08) U1.5@2754.91,3534.4 ; motor2.9@3073.43,1230 C33.1@3140,1230 ; C33.1@3134.7,1224.7 ccw(c3121.89,1211.89) 3121.89,1230 ccw(c3121.89,1248.11) C33.1@3134.7,1235.3 ; C32.1@3279.7,1104.7 cw(c3266.89,1091.89) 3285,1091.89 cw(c3303.11,1091.89) C32.1@3290.3,1104.7 ; 3280,1075 3285,1080 C32.1@3285,1110 ; C31.1@3420,1230 motor3.1@3485,1230 ; C31.1@3425.3,1224.7 cw(c3438.11,1211.89) 3438.11,1230 cw(c3438.11,1248.11) C31.1@3425.3,1235.3 ; VP1.2@3521,2693 3562,2693 3570,2685 ; VP1.2@3530,2690 VP1.2@3550,2690 ; VP1.2@3538.79,2701.82 cw(c3545.55,2689.17) 3555.69,2699.31 ; VP1.2@3545.86,2688.59 cw(c3555.51,2670.51) 3570,2685 ; C13.1@3654.7,2965.3 ccw(c3641.89,2978.11) 3660,2978.11 ccw(c3678.11,2978.11) C13.1@3665.3,2965.3 ; C13.1@3665.3,2949.7 cw(c3678.11,2936.89) 3678.11,2955 cw(c3678.11,2973.11) C13.1@3665.3,2960.3 ; 3680,3450 3660,3430 C13.1@3660,2955 3690,2955 3697,2948 R46.2@3697,2870 ; R46.2@3691.7,2880.3 ccw(c3678.89,2893.11) 3697,2893.11 ccw(c3715.11,2893.11) R46.2@3702.3,2880.3 ; R46.2@3697,2852 R46.2@3697,2870 ; R46.2@3702.3,2864.7 cw(c3715.11,2851.89) 3715.11,2870 cw(c3715.11,2888.11) R46.2@3702.3,2875.3 ; VP1.8@3743.5,2647 ccw(c3743.5,2679.59) 3766.54,2656.54 ; 3570,2685 3570,2655 3583,2642 VP1.8@3721,2642 3752,2642 3780,2670 3780,2840 3750,2870 R46.2@3697,2870
  Bottom Layer w20: 2257,1397 2266.57,1406.57 ; 2260.21,2748 2268.43,2739.79 SWD.2@2406,2739.79 ; 2260.21,3165 v3(2315,3165) 2387,3165 C16.2@2437,3215 ; SWD.6@2261,2561.36 2287.36,2535 v3(2335,2535) ; motor1.11@2293.43,1301.57 2316.57,1301.57 2365,1350 ; motor1.11@2311.56,1330.81 ccw(c2317.94,1397.06) 2365,1350 ; motor1.11@2338.12,1301.57 cw(c2390.13,1301.57) 2353.35,1338.35 ; 2375.11,1400.11 cw(c2386.35,1388.87) motor1.9@2386.35,1404.76 ; 2419.93,3197.93 cw(c2437,3180.86) C16.2@2437,3205 ; motor1.9@2425,1405 2380,1405 2365,1390 2365,1350 ; 2681,1075 motor2.1@2681,1230 ; v1(2851,4281) 2851,4136 2855,4132 ; 3073.43,1077 motor2.9@3073.43,1230 ; v3(3189,2157) v3(3189,2309) ; SERVO2.6@3294.78,1374.58 ccw(c3309.25,1401.63) 3330.94,1379.94 ; SERVO2.6@3304.21,1392.22 ccw(c3322.54,1426.46) C26.2@3350,1399 3326,1375 ; 3312,4279 3313.07,4277.93 USB2.5@3313.07,4162.86 ; SERVO2.6@3312.61,1366.57 cw(c3326,1360.16) 3326,1375 ; SERVO2.6@3312.61,1383.43 ccw(c3326,1389.84) 3326,1375 ; 3329.48,1375 ccw(c3329.48,1407.87) C26.2@3358.02,1391.55 ; 3332.93,1381.93 ccw(c3315.86,1399) C26.2@3340,1399 ; C26.2@3340.66,1401.48 cw(c3295,1427.6) SERVO2.6@3295,1375 3326,1375 ; 3485,1074 3485,1075 motor3.1@3485,1230 ; SERVO3.12@3534.74,1374.61 ccw(c3552.21,1401.1) 3574.66,1378.66 ; SERVO3.12@3545.75,1391.3 ccw(c3566,1422) C27.2@3592,1396 3569,1373 ; SERVO3.12@3550.91,1363.67 cw(c3569,1350.79) 3569,1373 ; SERVO3.12@3552.65,1383.35 ccw(c3569,1391.08) 3569,1373 ; 3572.72,1373 ccw(c3572.72,1404.75) C27.2@3599.79,1388.16 ; 3574.93,1378.93 ccw(c3557.86,1396) C27.2@3582,1396 ; C27.2@3582.74,1398.61 cw(c3537,1426.64) 3537,1373 3569,1373 ; TF1.10@3761,4016.98 cw(c3738.26,4000.05) 3758.31,3980 3775.87,3997.56 ; TF1.10@3767.59,4014.3 cw(c3754.8,3997.56) 3775.87,3997.56 ; 3774.67,3996.37 ccw(c3757.02,4014.02) TF1.10@3777.05,4028.93 ; TF1.10@3784.14,4014.3 ccw(c3796.93,3997.56) 3775.87,3997.56 ; TF1.10@3789.44,4015.49 cw(c3812.69,3992.23) 3812.69,4025.12 cw(c3812.69,4058) TF1.10@3789.44,4034.75 ; motor3.9@3877.43,1230 3877.43,1075 3877.43,1071.57 3878,1071 ; v1@3885.5,3985.5 3845.88,4025.12 ; TF1.11@4124.5,4015.49 ccw(c4101.25,3992.23) 4101.25,4025.12 ccw(c4101.25,4058) TF1.11@4124.5,4034.75 ; motor4.9@4131,1798.43 4276.43,1798.43 ; CAN.1@4131,2589 4273,2589 ; CAN.5@4131,2785.43 4273.57,2785.43 ; TF1.12@4137,3414.88 TF1.12@4153.82,3414.88 4174.86,3393.84 USB1.5@4174.86,3326.93 ; USB1.5@4142.86,3121.93 4250.07,3121.93 4252,3120 ; TF1.12@4163.87,3405.25 cw(c4137.35,3378.73) 4174.86,3378.73 ; USB1.5@4168.01,3353.46 ccw(c4151.48,3370) 4174.86,3370 ccw(c4198.24,3370) USB1.5@4181.71,3353.46 ; USB1.5@4174.86,3011.93 4215.93,3011.93 ; 4174.86,3385.26 cw(c4203.12,3385.26) TF1.12@4183.14,3405.25 ; USB1.5@4181.71,3005.08 cw(c4198.24,2988.55) 4198.24,3011.93 cw(c4198.24,3035.31) USB1.5@4181.71,3018.78 ; TF1.11@4183.14,4015.49 cw(c4206.39,3992.23) 4206.39,4025.12 cw(c4206.39,4058) TF1.11@4183.14,4034.75 ; USB1.5@4221.75,3046.47 cw(c4194.57,3033.29) 4215.93,3011.93 ; 4223.12,3414.88 4285,3476.76 4285,3965 4224.88,4025.12 TF1.11@4153.82,4025.12 3845.88,4025.12 ; USB1.5@4259,3055 4215.93,3011.93 ; 3775.87,3997.56 TF1.10@3775.87,4025.12 3845.88,4025.12 ; TF1.9@3771.22,3980.55 ccw(c3760.02,3991.75) 3775.87,3991.75 cw(c3760.02,3991.75) TF1.9@3771.22,3980.55
  Bottom Layer w30: 2940,4078 2991.21,4078 USB2.5@3108.07,4194.86 3108.07,4243.29 ; 3066.47,4153.26 ccw(c3024.87,4194.86) USB2.5@3083.7,4194.86 ; USB2.5@3108.07,4185.63 cw(c3172.7,4185.63) USB2.5@3149.09,4245.79 ; 3108.07,4229.63 cw(c3155.43,4229.63) USB2.5@3138.13,4273.72 ; USB2.5@3136.35,4246.83 ccw(c3124.49,4226.88) 3108.07,4243.29 ; USB2.5@3154.05,4268.73 cw(c3178.85,4243.93) 3178.85,4279 cw(c3178.85,4314.07) USB2.5@3154.05,4289.27 ; USB2.5@3369.73,4268.73 ccw(c3344.93,4243.93) 3344.93,4279 ccw(c3344.93,4314.07) USB2.5@3369.73,4289.27 ; USB2.5@3375.81,4245.41 cw(c3356.63,4181.8) USB2.5@3423.07,4181.8 ; USB2.5@3384.34,4245.45 cw(c3395.84,4208.7) 3423.07,4235.93 ; USB2.5@3384.47,4274.13 cw(c3368.8,4222.17) 3423.07,4222.17 ; USB2.5@3414.77,4212.79 ccw(c3436.84,4218.71) USB2.5@3425.41,4198.92 ; USB2.5@3419.76,4191.55 cw(c3395.03,4166.82) 3430,4166.82 ; 3430,4163.28 ccw(c3493.28,4163.28) v2@3448.54,4118.54 ; v2(3445,4115) 3435,4115 3430,4120 3430,4187.93 USB2.5@3423.07,4194.86 3423.07,4235.93 ; 3108.07,4243.29 USB2.5@3143.78,4279 3312,4279 USB2.5@3380,4279 3423.07,4235.93
  Bottom Layer w50: 2255,3650 2257,3648 2257,1397 2257,1337.57 motor1.11@2266,1328.57 ; 2257,1385.16 ccw(c2360.84,1385.16) motor1.11@2287.41,1311.74 ; 2257,1820.41 cw(c2360.84,1820.41) motor1.10@2287.41,1893.84 ; 2257,1987.59 ccw(c2360.84,1987.59) motor1.10@2287.41,1914.16 ; 2257,2457.61 cw(c2354.01,2457.61) SWD.6@2285.41,2526.2 ; 2257,2615.12 ccw(c2354.01,2615.12) SWD.6@2285.41,2546.52 ; 2257,2815.24 cw(c2354.01,2815.24) SWD.5@2285.41,2883.84 ; 2257,2972.76 ccw(c2354.01,2972.76) SWD.5@2285.41,2904.16 ; motor1.11@2293,1301.57 2293.43,1301.57 2520,1075 ; motor1.10@2293,1904 v4(2356,1904) 2372,1904 2408,1868 ; motor1.10@2296.18,1889 ccw(c2290.53,1959.79) motor1.10@2344.58,1913.73 ; motor1.10@2297.49,1937.8 cw(c2313.95,1888.39) v4@2350.78,1925.22 ; motor1.10@2313.29,1890.37 cw(c2342.55,1802.55) 2408,1868 ; motor1.11@2323.12,1301.57 ccw(c2394.8,1301.57) 2344.11,1250.89 ; v4@2356.22,1889 cw(c2357.28,1817.29) 2408,1868 ; 2360.7,1234.3 ccw(c2576,1449.59) motor2.10@2576,1145.12 ; 2367.32,1227.68 ccw(c2410,1270.36) C22.1@2410,1210 ; v4@2370.28,1908.6 ccw(c2431.73,1928.38) 2402.27,1870.94 ; motor1.1@2408,1799 2408,1868 ; C22.1@2410,1220 ccw(c2494.5,1220) 2434.75,1160.25 ; 2446.06,1148.94 ccw(c2576,1278.88) motor2.10@2576,1095.12 ; motor2.10@2562.57,1104.36 cw(c2520,1120.54) 2520,1075 ; motor2.10@2576,1115 motor2.10@2595,1115 ; motor2.10@2586.16,1109.41 ccw(c2669.24,1192.49) 2669.24,1075 ; 3085.18,1075 ccw(c3085.18,1192.49) motor2.11@3168.26,1109.41 ; motor2.11@3176.43,1097 motor2.11@3178.43,1096.43 ; motor2.11@3188.59,1109.41 ccw(c3271.67,1192.49) 3271.67,1075 ; 3219.64,1075 ccw(c3219.64,1170.36) C32.1@3287.07,1102.93 ; C32.1@3282.93,1102.93 ccw(c3350.36,1170.36) motor3.10@3350.36,1075 ; 3286.76,1075 ccw(c3286.76,1192.49) motor3.10@3369.84,1109.41 ; motor3.10@3378,1097 motor3.10@3382.94,1097.85 ; motor3.10@3390.16,1109.41 ccw(c3473.24,1192.49) 3473.24,1075 ; U1.4@3560.63,3514.65 U1.4@3604.59,3514.65 3615.35,3514.65 3680,3450 3819.69,3450 3820,3450.31 ; U1.4@3561.63,3518 U1.4@3601.23,3518 ; U1.4@3568.5,3504.21 cw(c3568.5,3365.91) 3666.29,3463.71 ; U1.4@3604.59,3504.21 cw(c3604.59,3453.03) 3640.78,3489.22 ; TF1.13@3775.87,3450.31 3820,3450.31 ; 3889.18,1075 ccw(c3889.18,1192.49) motor3.11@3972.26,1109.41 ; SERVO3.3@3895,1375 4185,1375 ; motor3.11@3982.43,1095.12 ccw(c3982.43,1234.4) 4080.91,1135.91 ; motor3.11@3982.43,1145.12 ccw(c3982.43,1405.11) 4166.27,1221.27 ; motor3.11@3995.12,1105.98 ccw(c4030,1124.48) 4030,1085 ; 4051.92,3450.31 cw(c4051.92,3332.67) TF1.12@4135.11,3415.86 ; 4066.35,1375 ccw(c4066.35,1449) motor4.1@4118.67,1396.67 ; TF1.12@4137,3414.88 4101.57,3450.31 3820,3450.31 ; motor4.1@4141.51,1398.95 ccw(c4185,1426.46) 4185,1375 ; TF1.12@4153.82,3414.88 4223.12,3414.88 4252,3386 4252,3120 USB1.5@4252,3048 ; 4185.39,1374.61 cw(c4111.79,1301) 4215.88,1301 cw(c4143.17,1301) 4194.59,1249.59 ; motor4.10@4223,1278 4030,1085 ; CAN.7@4235.84,2900.59 ccw(c4197.85,2938.58) 4251.57,2938.58 ; motor4.11@4246,1903.43 motor4.11@4265.57,1903.43 ; CAN.7@4246,2890.43 4246,2879 4280,2845 ; USB1.5@4251.57,3026.14 cw(c4287.86,3026.14) USB1.5@4262.2,3051.8 ; USB1.5@4251.57,3047.57 4251.57,2926.43 CAN.7@4277,2901 ; motor4.10@4251.59,1311.16 ccw(c4182.99,1379.76) 4280,1379.76 ; motor4.11@4251.59,1893.26 cw(c4182.99,1824.67) 4280,1824.67 ; motor4.11@4251.59,1913.59 ccw(c4182.99,1982.18) 4280,1982.18 ; CAN.6@4251.59,2473.84 cw(c4182.99,2405.24) 4280,2405.24 ; CAN.6@4251.59,2494.16 ccw(c4182.99,2562.76) 4280,2562.76 ; CAN.7@4251.59,2880.26 cw(c4182.99,2811.67) 4280,2811.67 ; motor4.10@4255,1315 4280,1340 4280,2845 ; CAN.7@4256.22,2877.16 cw(c4241.33,2841.47) 4280,2841.47 ; motor4.10@4265,1295 4185,1375 ; CAN.7@4274.38,2883.58 ccw(c4303.05,2868.06) 4280,2845 ; 2520,1075 2681,1075 3280,1075 3485,1075 3877.43,1075 3982.43,1075 motor3.11@3982.43,1115 4012.43,1085 4030,1085
  Bottom Layer w80: power1.2@2569.53,3998.11 cw(c2630.89,3998.11) 2587.5,4041.5 ; power1.2@2573.13,3990.21 cw(c2607.73,4030) 2555,4030 2555,4023.11 power1.2@2580,3998.11 ; power1.2@2596.89,3998.11 power1.2@2580,3998.11 ; U1.5@2741.84,3510.69 ccw(c2687.3,3605.16) 2792.67,3576.93 ; U1.6@2741.86,3617.88 cw(c2663.41,3539.43) U1.5@2774.35,3539.43 ; U1.5@2742.79,3511.42 ccw(c2666.6,3587.61) U1.6@2774.35,3587.61 ; U1.5@2774.35,3508.55 cw(c2923.2,3508.55) U1.6@2822.32,3618 ; U1.5@2774.35,3521.65 U1.6@2774.35,3621.65 ; U1.6@2786.07,3617.53 cw(c2751.56,3589.43) v3@2789.16,3565.63 ; U1.5@2786.09,3511.79 ccw(c2750.62,3540.24) v3@2789.2,3564.32 ; U1.6@2793.63,3611.42 ccw(c2754.31,3650.74) 2809.92,3650.74 ; U1.5@2822.29,3511.31 cw(c2925.27,3621.64) U1.6@2774.35,3621.64 ; 2940,4078 2940,3855 2915,3830 2835,3830 2809.92,3804.92 2809.92,3644.66 2776.92,3623.31 U1.6@2774.35,3621.65 ; 2942,4078 2888,4132 2855,4132 2685,4132 2682,4129 2675,4129 2580,4034 power1.2@2580,3998.11 ; U1.3@3519.19,3619.18 cw(c3513.84,3571.7) v4@3561.63,3571.7 ; U1.4@3521.91,3511.42 ccw(c3426.03,3607.3) U1.3@3561.63,3607.3 ; U1.3@3521.91,3617.88 cw(c3426.03,3521.99) U1.4@3561.63,3521.99 ; v4@3549.51,3570.07 cw(c3589.67,3593.26) U1.3@3549.83,3616.98 ; U1.4@3561.63,3518 v4@3561.63,3557.61 ; U1.4@3561.63,3521.86 cw(c3697.41,3521.86) U1.3@3601.4,3617.88 ; v4@3561.63,3571.65 cw(c3609.46,3571.65) U1.3@3604.12,3619.18 ; U1.3@3561.63,3607.34 ccw(c3697.28,3607.34) U1.4@3601.36,3511.42 ; U1.3@3561.63,3614.65 v4@3561.63,3557.61 ; U1.3@3564.94,3614.96 ccw(c3689.55,3606.33) U1.4@3601.23,3518 ; U1.4@3572.28,3512.08 ccw(c3535.9,3536.81) v4@3574,3558.81 ; U1.3@3573.42,3616.99 cw(c3533.58,3593.21) v4@3573.76,3570.01 ; U1.4@3604.59,3514.65 U1.4@3601.23,3518 ; v4@3561.63,3557.61 ccw(c3609.43,3557.61) 3604.08,3510.11 cw(c3609.43,3557.61) v4@3561.63,3557.61 ; v4@3561.63,3557.61 cw(c3513.83,3557.61) 3519.19,3510.11 ccw(c3513.83,3557.61) v4@3561.63,3557.61 ; v4@3561.63,3557.61 U1.4@3601.23,3518 ; U1.3@3521.2,3618.45 cw(c3471.46,3543.25) 3561.63,3543.25 ccw(c3471.46,3543.25) U1.3@3521.2,3618.45 ; U1.4@3561.63,3543.22 cw(c3651.79,3543.22) 3602.11,3618.46 ccw(c3651.79,3543.22) U1.4@3561.63,3543.22
I2C2_SCL: GPS.2 HF_CORE1.43 IIC.4 R33.1 | length 1796.9
  Top Layer w6: IIC.4@3291.51,2005.23 cw(c3289.34,2000.08) 3294.93,2000.08 cw(c3300.51,2000.08) IIC.4@3298.34,2005.23 ; IIC.4@3292.28,2015.13 ccw(c3301.29,2009.07) 3293.61,2001.39 ; IIC.4@3294.93,2035 3294.93,2000.07 3303.93,1991.07 3792.07,1991.07 3811.21,2010.21 GPS.2@3811.21,2035 v1(3811.21,2085) ; IIC.4@3297.26,2011.78 ccw(c3307.46,2004.92) 3298.77,1996.23 ; IIC.4@3302.24,2008.43 ccw(c3313.63,2000.78) 3303.92,1991.08 ; HF_CORE1.43@3575.91,2301.07 cw(c3559.7,2284.85) 3582.63,2284.85 cw(c3605.57,2284.85) HF_CORE1.43@3589.35,2301.07 ; HF_CORE1.43@3576.27,2303.64 cw(c3560.9,2288.27) 3582.63,2288.27 cw(c3604.36,2288.27) HF_CORE1.43@3588.99,2303.64 ; HF_CORE1.43@3576.27,2316.36 ccw(c3560.9,2331.73) 3582.63,2331.73 ccw(c3604.36,2331.73) HF_CORE1.43@3588.99,2316.36 ; HF_CORE1.43@3582.63,2344.5 v1(3582.63,2310) 3582.63,2264.37 3598,2249 3751,2249 3803,2301 3827.29,2301 v1(3855.29,2273) ; 3793.96,1992.96 ccw(c3773.56,2013.35) GPS.2@3802.4,2013.35 ; 3801.52,2000.52 cw(c3811.21,1990.83) GPS.2@3811.21,2004.54 ; 3804.2,2003.2 ccw(c3794.05,2013.35) GPS.2@3808.4,2013.35 ; v1@3804.85,2078.64 cw(c3789.48,2063.27) 3811.21,2063.27 cw(c3832.94,2063.27) v1@3817.58,2078.64 ; GPS.2@3804.98,2062.88 ccw(c3789.94,2077.93) 3811.21,2077.93 ccw(c3832.48,2077.93) GPS.2@3817.44,2062.88 ; v1@3806.43,2077.38 cw(c3803.05,2072) 3809.18,2070.35 cw(c3818.46,2067.87) v1@3814.72,2076.71 ; v1@3807.71,2076.71 cw(c3803.97,2067.87) 3813.24,2070.35 cw(c3819.38,2072) v1@3816,2077.38 ; v1@3846.29,2273 ccw(c3824.56,2273) 3839.92,2288.36 ccw(c3855.29,2303.73) v1@3855.29,2282
  Bottom Layer w6: R33.1@3571.89,2353.51 cw(c3551.4,2333.03) 3580.38,2333.03 cw(c3609.35,2333.03) R33.1@3588.86,2353.51 ; v1@3576.27,2316.36 ccw(c3566.35,2326.28) 3580.38,2326.28 ; 3580.38,2322.69 ccw(c3595.32,2322.69) v1@3584.75,2312.12 ; 3580.38,2337.17 ccw(c3609.8,2337.17) v1@3588.99,2316.36 ; R33.1@3580.38,2362 3580.38,2312.26 v1(3582.63,2310) ; v1@3804.85,2091.36 ccw(c3789.48,2106.73) 3811.21,2106.73 ccw(c3832.94,2106.73) v1@3817.58,2091.36 ; v1(3811.21,2085) 3811.21,2228.93 v1(3855.29,2273) ; v1@3846.29,2273 cw(c3824.56,2273) 3839.92,2257.64 cw(c3855.29,2242.27) v1@3855.29,2264
I2C2_SDA: GPS.3 HF_CORE1.44 IIC.2 R34.1 | length 2030.3
  Top Layer w6: IIC.2@3190.48,2062.88 ccw(c3175.44,2077.93) 3196.71,2077.93 ccw(c3217.98,2077.93) IIC.2@3202.94,2062.88 ; IIC.2@3196.71,2035 3196.71,2082.71 3218,2104 3253,2104 3272,2085 3272,1993 3288,1977 3846,1977 3860.43,1991.43 GPS.3@3860.43,2035 v1(3860.43,2085) ; HF_CORE1.44@3615.28,2301.07 cw(c3599.07,2284.85) 3622,2284.85 cw(c3644.93,2284.85) HF_CORE1.44@3628.72,2301.07 ; HF_CORE1.44@3615.64,2303.64 cw(c3600.27,2288.27) 3622,2288.27 cw(c3643.73,2288.27) HF_CORE1.44@3628.36,2303.64 ; HF_CORE1.44@3615.64,2316.36 ccw(c3600.27,2331.73) 3622,2331.73 ccw(c3643.73,2331.73) HF_CORE1.44@3628.36,2316.36 ; HF_CORE1.44@3622,2344.5 v1(3622,2310) 3622,2277 3633,2266 3738,2266 3788,2316 3855,2316 v1(3898,2273) ; v1@3854.06,2078.64 cw(c3838.7,2063.27) 3860.43,2063.27 cw(c3882.15,2063.27) v1@3866.79,2078.64 ; GPS.3@3854.19,2007.12 cw(c3839.15,1992.07) 3860.43,1992.07 cw(c3881.7,1992.07) GPS.3@3866.66,2007.12 ; GPS.3@3854.19,2062.88 ccw(c3839.15,2077.93) 3860.43,2077.93 ccw(c3881.7,2077.93) GPS.3@3866.66,2062.88 ; v1@3855.64,2077.38 cw(c3852.26,2072) 3858.4,2070.35 cw(c3867.67,2067.87) v1@3863.93,2076.71 ; v1@3856.92,2076.71 cw(c3853.18,2067.87) 3862.45,2070.35 cw(c3868.59,2072) v1@3865.21,2077.38 ; v1@3889,2273 ccw(c3867.27,2273) 3882.64,2288.36 ccw(c3898,2303.73) v1@3898,2282
  Bottom Layer w6: v1(3622,2310) 3646,2334 ; v1@3622,2319 ccw(c3622,2340.73) 3637.36,2325.36 ccw(c3652.73,2310) v1@3631,2310 ; R34.1@3637.72,2353.31 cw(c3619.34,2334) 3646,2334 ; R34.1@3646,2362 3646,2334 ; R34.1@3654.28,2353.31 ccw(c3672.66,2334) 3646,2334 ; v1@3854.06,2091.36 ccw(c3838.7,2106.73) 3860.43,2106.73 ccw(c3882.15,2106.73) v1@3866.79,2091.36 ; v1(3860.43,2085) 3860.43,2235.43 v1(3898,2273) ; v1@3889,2273 cw(c3867.27,2273) 3882.64,2257.64 cw(c3898,2242.27) v1@3898,2264
LED1: HF_CORE1.4 LED1.2 | length 2003.4
  Top Layer w6: HF_CORE1.4@2550,3245.38 2615.38,3245.38 2650,3280 2650,3385 2750,3485 3760,3485 4069.77,3794.77 4069.77,3835.23 LED1.2@4079.54,3845 ; HF_CORE1.4@2593.43,3238.66 cw(c2609.65,3222.45) 2609.65,3245.38 cw(c2609.65,3268.32) HF_CORE1.4@2593.43,3252.1 ; LED1.2@4064.35,3834.59 cw(c4051.26,3821.5) 4069.77,3821.5 ; 4069.77,3797.44 cw(c4122.31,3797.44) LED1.2@4085.16,3834.59 ; 4069.77,3811.92 cw(c4107.83,3811.92) LED1.2@4080.92,3838.84 ; 4069.77,3826.41 cw(c4093.34,3826.41) LED1.2@4076.67,3843.08